# Altium PCB PCB_Aquecedor.PcbDoc
Units mm, origin at the board's own origin, x right, y up, seen from the top; angles counter-clockwise.
Board outline 85.6 x 66.17 mm, 2 copper layers (Top Layer, Bottom Layer); 52 components, 48 nets, 165 pads, 0 vias.
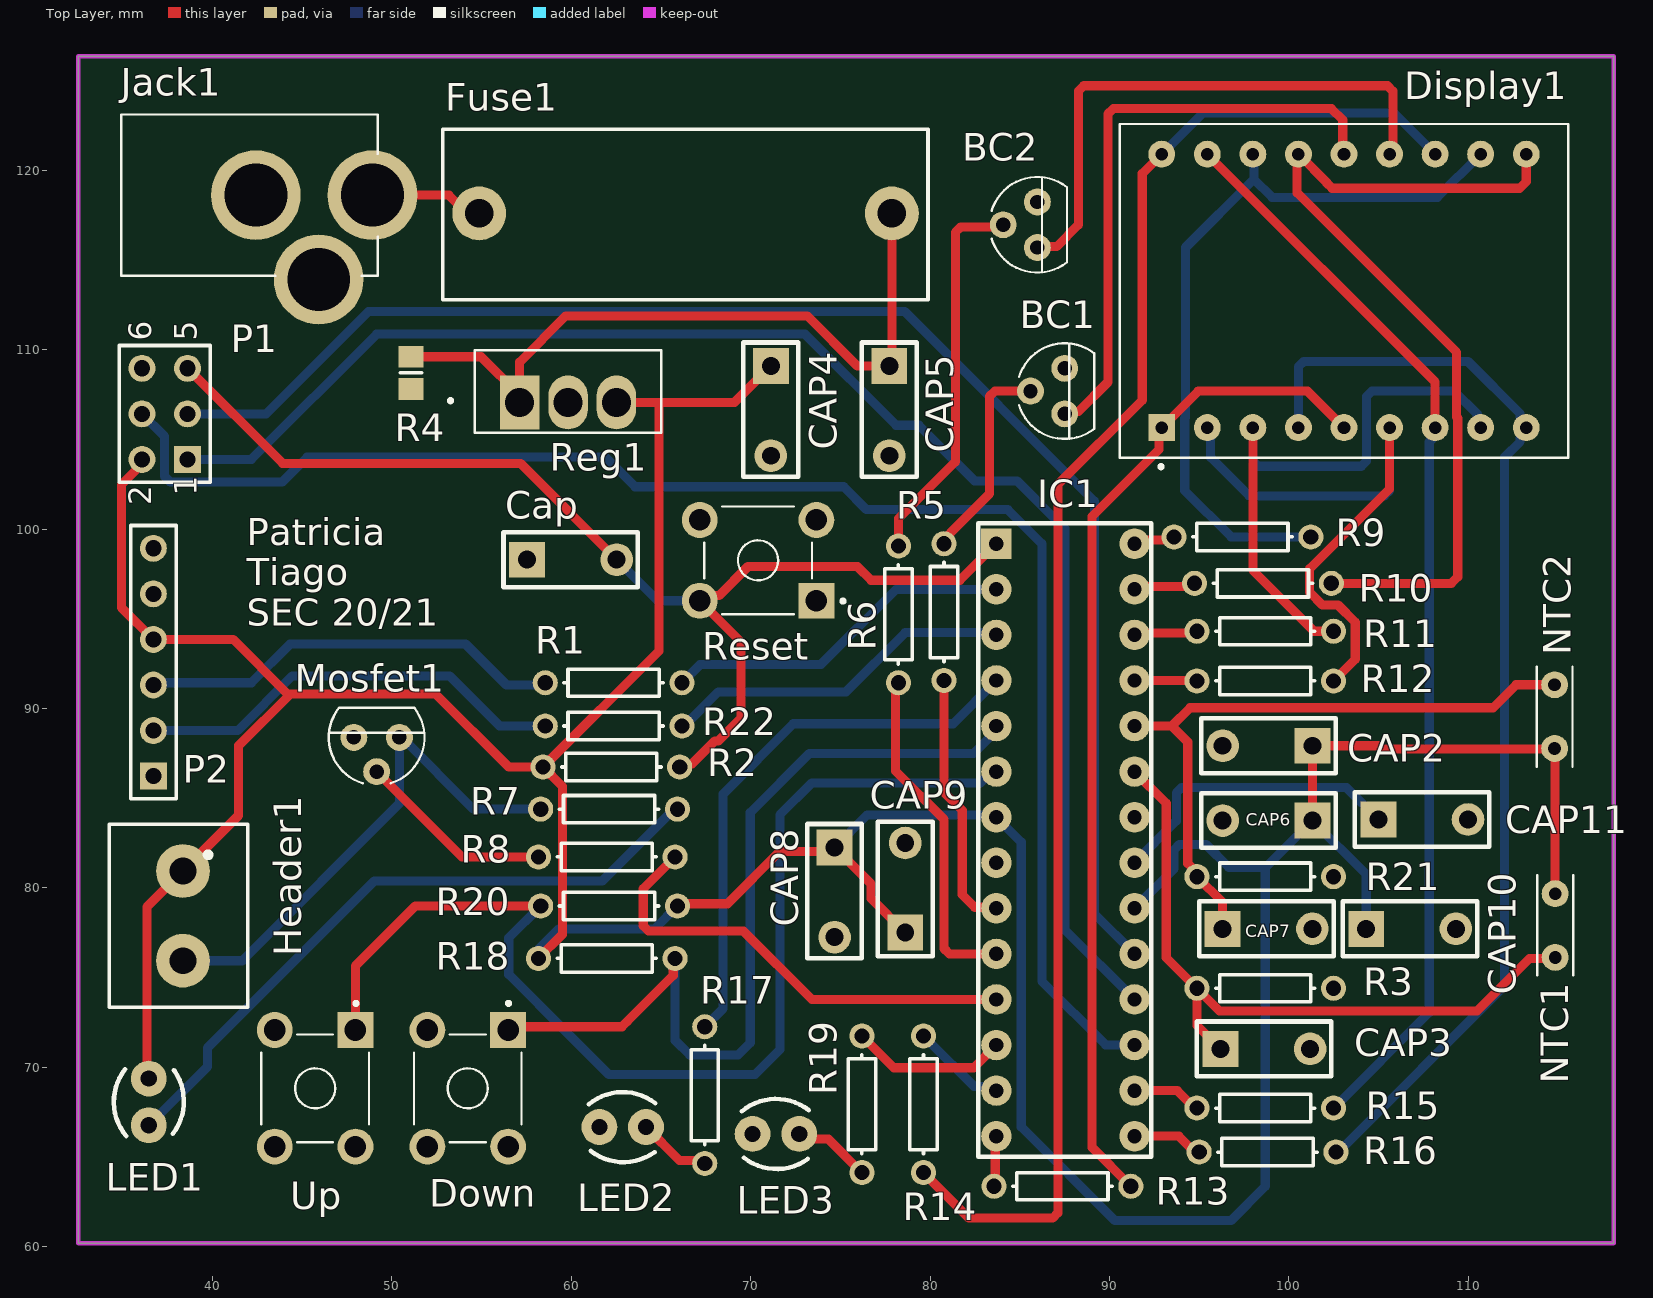
[diagram p0: Top Layer view]
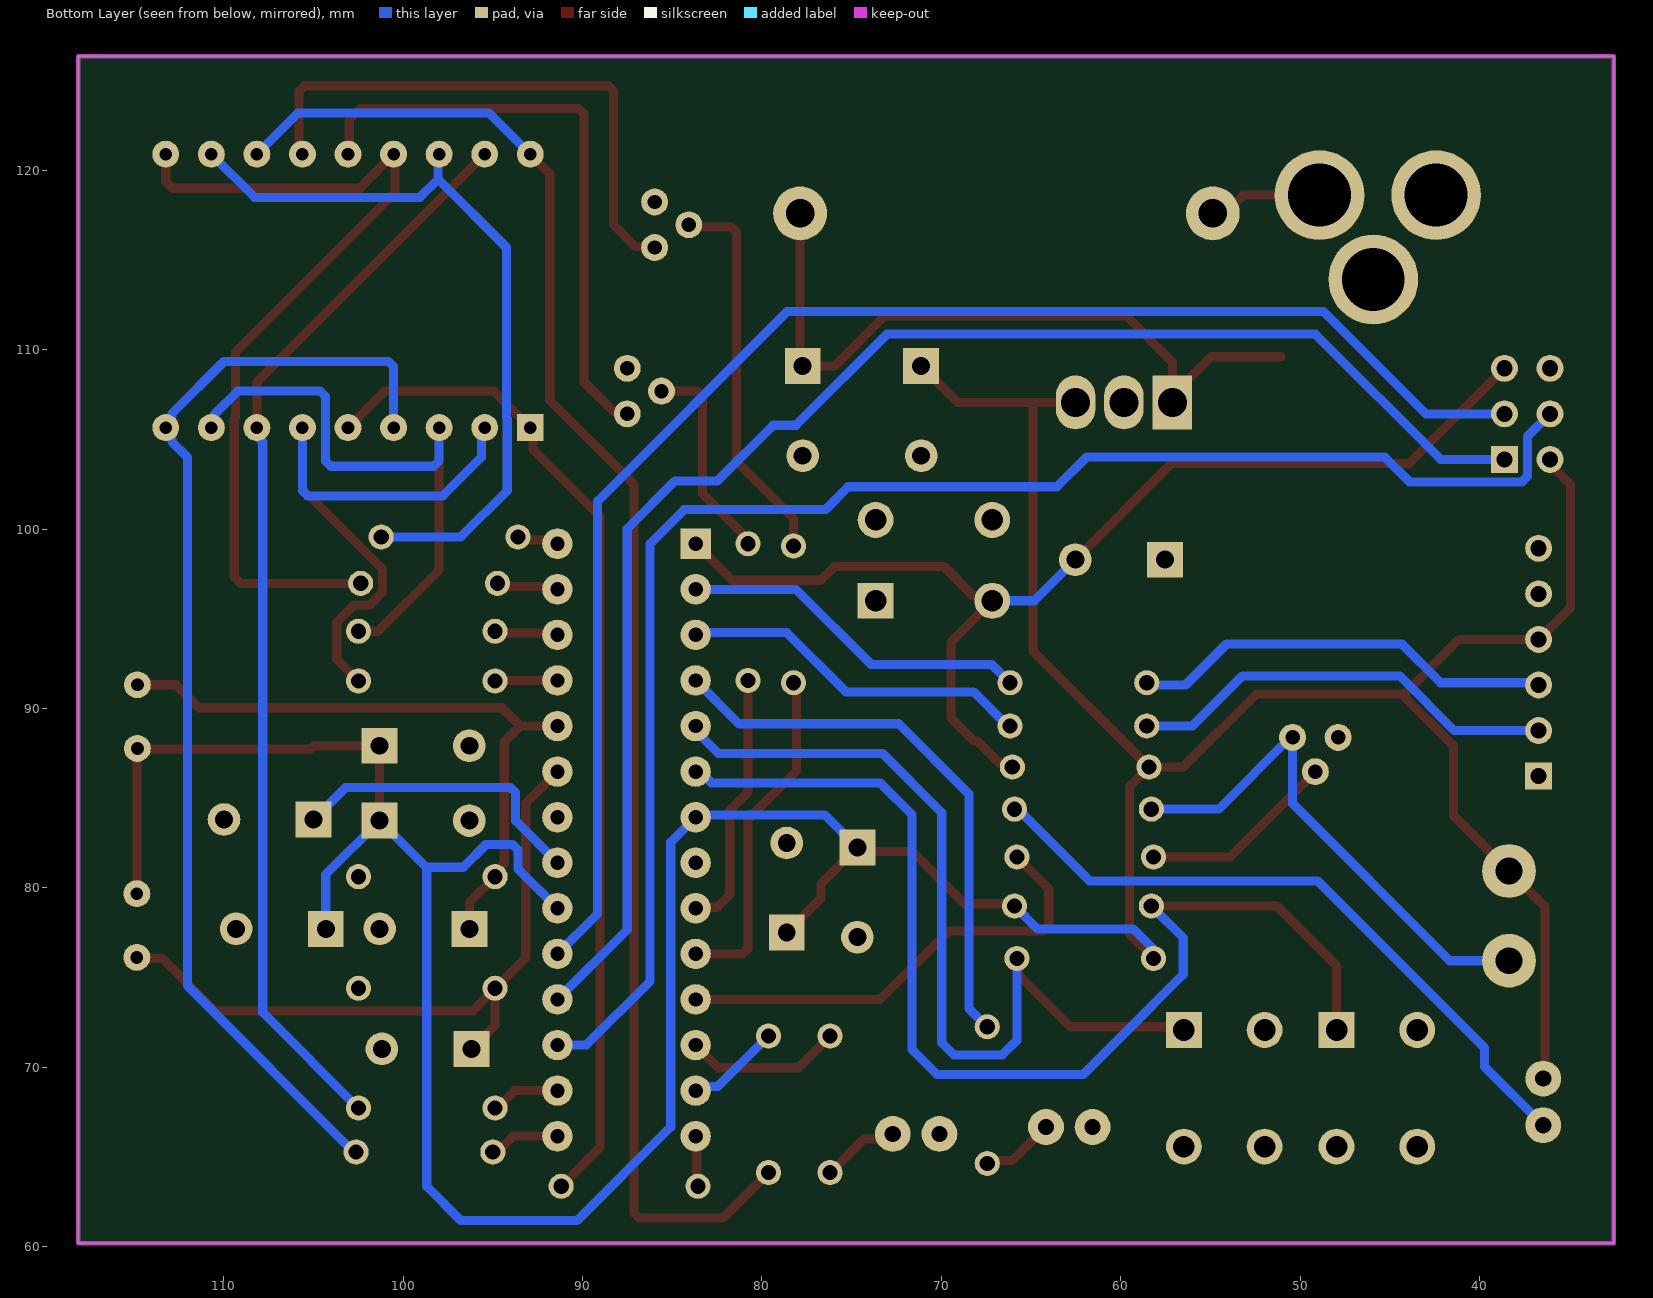
[diagram p1: Bottom Layer view, seen from below]

## Layer stack, top to bottom
Top Solder: solder mask 0.0102, Solder Resist, Dk 3.5
Top Layer: signal copper 0.0356
Dielectric 1: dielectric 0.32, FR-4, Dk 4.8
Bottom Layer: signal copper 0.0356
Bottom Solder: solder mask 0.0102, Solder Resist, Dk 3.5

## Board outline
32.512,60.198 32.512,126.365 118.11,126.365 118.11,60.198

## Design rules (kind name [scope] priority, off if disabled: settings)
Clearance [All] p1: gap=0.254 ignorepadtopadclearanceinfootprint=FALSE except(0: Arc-Hole Track-Hole SMDPad-Hole THPad-Hole Via-Hole Fill-Hole Poly-Hole Region-Hole Text-Hole)
Height [All] p1: minheight=0 maxheight=127 prefheight=12.7
PolygonConnect [All] p1: connectstyle=Relief reliefconductorwidth=0.254 reliefentries=4 polygonreliefangle="90 Angle" airgapwidth=0.254
RoutingVias [All] p1: holewidth=0.711 width=1.27 viastyle="Through Hole" minholewidth=0.711 minwidth=1.27 maxholewidth=0.711 maxwidth=1.27
SolderMaskExpansion [All] p1: expansion=0.102 istentingtop=FALSE
Width [All] p1: maxlimit=1.27 minlimit=0.254 preferedwidth=0.508 minimp=50.000000 maximp=50.000000 favimp=50.000000
29 further rules are at their usual default settings.

## Classes and differential pairs
component class U_Esquematico_MOSFET: Header1 LED1 Mosfet1 R7 R8
component class U_Esquematico_Fonte: CAP4 CAP5 Fuse1 Jack1 R4 Reg1
component class "U_Esquema NTC": CAP2 CAP3 CAP6 CAP7 NTC1 NTC2 R3 R21
component class U_Esquema_Display: BC1 BC2 Display1 R5 R6 R9 R10 R11 R12 R13 R14 R15 R16
component class U_Esquema_ATMEGA328: Cap CAP8 CAP9 CAP10 CAP11 IC1 P1 P2 R1 R2 R22 Reset
component class Esquema_Principal: DOwn LED2 LED3 R17 R18 R19 R20 Up

## Components (designator, comment, footprint, x,y, rotation, side; value= is the part's Value field where it differs from the comment)
BC1 "Transistor BC547" "TRANSISTOR BC547" 87.503,107.696 r90 top
BC2 "Transistor BC547" "TRANSISTOR BC547" 85.979,116.967 r90 top
Cap "100nF" "CAPACITOR ELETRO" 60.031,98.298 r0 top
CAP2 "100nF" "CAPACITOR ELETRO" 98.806,87.926 r180 top
CAP3 "100nF" "CAPACITOR ELETRO" 98.679,71.033 r0 top
CAP4 "10uF" "CAPACITOR ELETRO" 71.12,106.593 r270 top
CAP5 "10uF" "CAPACITOR ELETRO" 77.724,106.593 r270 top
CAP6 "100nF" "CAPACITOR ELETRO" 98.806,83.757 r180 top
CAP7 "100nF" "CAPACITOR ELETRO" 98.806,77.724 r0 top
CAP8 "100nF" "CAPACITOR ELETRO" 74.676,79.756 r270 top
CAP9 "100nF" "CAPACITOR ELETRO" 78.613,80.01 r90 top
CAP10 "100nF" "CAPACITOR ELETRO" 106.807,77.724 r0 top
CAP11 "10nF" "CAPACITOR ELETRO" 107.482,83.82 r0 top
Display1 "Dual 7Segment Display" "DUAL DIGIT DISPLAY" 103.195,113.282 r0 top
Down "Tactil Buttom" "TACTIL BUTTOM" 54.229,68.834 r270 top (schematic designator Buttom2)
Fuse1 "Fuse Holder" "FUSE HOLDER" 66.167,117.602 r0 top
Header1 "Screw Header 2P" "SCREW HEADER 2 POSICOES" 38.354,78.446 r270 top
IC1 "ATmega328" ATMEGA328 83.693,99.187 r90 top
Jack1 "Jack 5mm 12V" "JACK 5MM" 45.918,118.618 r0 top
LED1 "LED" LED_THT 36.449,68.072 r270 top
LED2 "LED" LED_THT 62.865,66.675 r180 top
LED3 "LED" LED_THT 71.404,66.294 r180 top
Mosfet1 "Mosfet BS170" "MOSFET BS170" 49.149,88.392 r180 top
NTC1 "NTC" NTC 114.84,78.431 r270 top
NTC2 "NTC" NTC 114.808,89.027 r90 top
P1 "Header 3X2" HDR2X3 38.608,103.886 r90 top
P2 "Header 6" HDR1X6 36.703,86.233 r90 top
R1 "Res1" AXIAL-0.3 62.357,91.44 r0 top value=1K
R2 "Res1" AXIAL-0.3 62.23,86.741 r0 top value=1K
R3 "Res1" AXIAL-0.3 98.679,74.409 r180 top value=1K
R4 "Res Varistor" 6-0805_N 51.054,108.712 r90 top
R5 "Res1" AXIAL-0.3 80.772,95.377 r90 top value=1K
R6 "Res1" AXIAL-0.3 78.232,95.25 r90 top value=1K
R7 "Res1" AXIAL-0.3 62.103,84.395 r0 top value=1K
R8 "Res1" AXIAL-0.3 61.976,81.732 r180 top value=1K
R9 "Res1" AXIAL-0.3 97.409,99.568 r0 top value=1K
R10 "Res1" AXIAL-0.3 98.552,96.981 r0 top value=1K
R11 "Res1" AXIAL-0.3 98.679,94.31 r0 top value=1K
R12 "Res1" AXIAL-0.3 98.679,91.542 r0 top value=1K
R13 "Res1" AXIAL-0.3 87.376,63.373 r0 top value=1K
R14 "Res1" AXIAL-0.3 79.629,67.945 r270 top value=1K
R15 "Res1" AXIAL-0.3 98.679,67.732 r0 top value=1K
R16 "Res1" AXIAL-0.3 98.806,65.278 r0 top value=1K
R17 "Res1" AXIAL-0.3 67.437,68.453 r90 top value=1K
R18 "Res1" AXIAL-0.3 61.976,76.073 r180 top value=1K
R19 "Res1" AXIAL-0.3 76.2,67.945 r90 top value=1K
R20 "Res1" AXIAL-0.3 62.103,78.994 r180 top value=1K
R21 "Res1" AXIAL-0.3 98.679,80.63 r180 top value=1K
R22 "Res1" AXIAL-0.3 62.357,89.027 r0 top value=1K
Reg1 "Regulador 12-5 7805" "REGULADOR 12-5 7805" 59.817,107.061 r0 top
Reset "Tactil Buttom" "TACTIL BUTTOM" 70.41,98.262 r180 top (schematic designator Buttom1)
Up "Tactil Buttom" "TACTIL BUTTOM" 45.72,68.834 r270 top (schematic designator Buttom3)

## Footprints (in the part's own frame and the unit in brackets; to place one, negate y for a bottom-side part, rotate by r counter-clockwise, add the part's x,y. Pads: shape width x height; smd on the part's side, far side on the other; paste and mask are expansions set on the pad)
6-0805_N [mm] "Chip Resistor, Body 2.0x1.2mm, IPC Medium Density"
  rect 1.2x1.4 smd: 1(-0.9,0) 2(0.9,0)
  silkscreen extent 0,-0.6 0,0.6, body extent -1.07,-0.7 1.07,0.7, height 0.7
ATMEGA328 [mm]
  rect 1.7x1.7 hole 0.8: 1(0,0)
  round 1.7 hole 0.8: 2(-2.54,0) 3(-5.08,0) 4(-7.62,0) 5(-10.16,0) 6(-12.7,0) 7(-15.24,0) 8(-17.78,0) 9(-20.32,0) 10(-22.86,0) 11(-25.4,0) 12(-27.94,0) 13(-30.48,0) 14(-33.02,0) 15(-33.02,-7.7) 16(-30.48,-7.7) 17(-27.94,-7.7) 18(-25.4,-7.7) 19(-22.86,-7.7) 20(-20.32,-7.7) 21(-17.78,-7.7) 22(-15.24,-7.7) 23(-12.7,-7.7) 24(-10.16,-7.7) 25(-7.62,-7.7) 26(-5.08,-7.7) 27(-2.54,-7.7) 28(0,-7.7)
  silkscreen extent -34.16,-8.64 1.14,1.02, body extent -33.91,-7.78 0.74,0.13, height 5.54
AXIAL-0.3 [mm] "Axial Device, Thru-Hole; 2 Leads; 0.3 in Pin Spacing"
  round 1.4 hole 0.85: 1(-3.81,0) 2(3.81,0)
  silkscreen extent -2.77,-0.76 2.77,0.76
"CAPACITOR ELETRO" [mm] "33pF"
  rect 2x2 hole 1: 1(-2.5,0)
  round 1.82 hole 1: 2(2.5,0)
  silkscreen extent -3.81,-1.52 3.68,1.52, body extent -2.75,-1.25 2.75,1.25, height 6.54
"DUAL DIGIT DISPLAY" [mm]
  rect 1.5x1.5 hole 0.7: 1(-10.287,-7.62)
  round 1.5 hole 0.7: 2(-7.747,-7.62) 3(-5.207,-7.62) 4(-2.667,-7.62) 5(-0.127,-7.62) 6(2.413,-7.62) 7(4.953,-7.62) 8(7.493,-7.62) 9(10.033,-7.62) 10(10.033,7.62) 11(7.493,7.62) 12(4.953,7.62) 13(2.413,7.62) 14(-0.127,7.62) 15(-2.667,7.62) 16(-5.207,7.62) 17(-7.747,7.62) 18(-10.287,7.62)
  silkscreen extent -12.63,-9.9 12.37,9.3, body extent -12.63,-9.52 12.37,9.52, height 8
"FUSE HOLDER" [mm]
  round 3 hole 1.6: 1(-11.3,0) 2(11.7,0)
  silkscreen extent -13.33,-4.83 13.72,4.7, body extent -13.12,-4.6 13.48,4.4, height 28.16
HDR1X6 [mm] "Connector; Header; 6 Position"
  rect 1.5x1.5 hole 0.9: 1(0,0)
  round 1.5 hole 0.9: 2(2.54,0) 3(5.08,0) 4(7.62,0) 5(10.16,0) 6(12.7,0)
  silkscreen extent -1.27,-1.27 13.97,1.27
HDR2X3 [mm] "Connector; Header; 3x2 Position"
  rect 1.5x1.5 hole 0.9: 1(0,0)
  round 1.5 hole 0.9: 2(0,2.54) 3(2.54,0) 4(2.54,2.54) 5(5.08,0) 6(5.08,2.54)
  silkscreen extent -1.27,-1.27 6.35,3.81
"JACK 5MM" [mm]
  round 5 hole 3.5: 2(0,-4.7) 3(-3.5,0) 4(3,0)
  silkscreen extent -11,-4.5 3.3,4.5, body extent -10.7,-4.95 3.3,4.45, height 11.5
LED_THT [mm]
  round 2 hole 0.9: A(-1.3,0) K(1.3,0)
  silkscreen extent -1.82,-1.95 1.9,1.96, body extent -1.62,-1.58 1.52,1.52, height 7.48
"MOSFET BS170" [mm]
  round 1.5 hole 0.8: 1(1.27,0) 2(0,1.905) 3(-1.27,0)
  silkscreen extent -2.66,-1.65 2.66,2.55
NTC [mm]
  round 1.5 hole 0.71: 1(-1.25,0) 2(2.3,0)
  silkscreen extent -2.29,-1 3.3,1
"REGULADOR 12-5 7805" [mm]
  rect 2.2x3 hole 1.6: 1(-2.7,0)
  oval 2.2x3 hole 1.6: 2(0,0) 3(2.7,0)
  silkscreen extent -6.65,-1.69 5.2,2.91, body extent -5.08,-1.91 5.08,2.67, height 19.74
"SCREW HEADER 2 POSICOES" [mm]
  round 3 hole 1.5: 1(-2.5,0) 2(2.5,0)
  silkscreen extent -5.1,-4.1 5.1,3.6, body extent -5.08,-4.57 5.58,4.43, height 15.2
"TACTIL BUTTOM" [mm]
  rect 2x2 hole 1.2: 1(-3.25,2.25)
  round 2 hole 1.2: 2(3.25,2.25) 3(-3.25,-2.25) 4(3.25,-2.25)
  silkscreen extent -4.83,-3 3,3, body extent -3.9,-3 3.9,2.99, height 10.5
"TRANSISTOR BC547" [mm]
  round 1.5 hole 0.8: 1(1.27,0) 2(0,1.905) 3(-1.27,0)
  silkscreen extent -2.66,-1.65 2.66,2.55

## Part data
Cap CAP2 CAP3 CAP4 CAP5 CAP6 CAP7 CAP8 CAP9 CAP10 CAP11: library part 33pF, "Condensador"
P1: "Header, 3-Pin, Dual row", LatestRevisionDate=17-Jul-2002, LatestRevisionNote="Re-released for DXP Platform.", Publisher="Altium Limited"
P2: "Header, 6-Pin", LatestRevisionDate=17-Jul-2002, LatestRevisionNote="Re-released for DXP Platform.", Publisher="Altium Limited"
R1 R2 R3 R5 R6 R7 R8 R9 R10 R11 R12 R13 R14 R15 R16 R17 R18 R19 R20 R21 R22: "Resistor", LatestRevisionDate=17-Jul-2002, LatestRevisionNote="Re-released for DXP Platform.", PackageDescription="Axial Device, Thru-Hole; 2 Leads; 0.3 in Pin Spacing", PackageReference=AXIAL-0.3, Published=8-Jun-2000, Publisher="Altium Limited"
R4: "Varistor (Voltage-Sensitive Resistor)", Code_IPC=RESC2012, LatestRevisionDate=29-May-2009, LatestRevisionNote="IPC-7351 Footprint Added.", PackageDescription="Chip Resistor 0805 Case Size", PackageReference=6-0805, PackageVersion=Mar-2003, Published=24-Mar-1999, Publisher="Altium Limited"

## Nets (pads, with @x,y where several pads share a name; then routed paths per layer and width w, separated by ;. In a path a pad name is that pad's centre, name@x,y a point inside that pad or via, vN(x,y) a via of type N, cw(c..) or ccw(c..) an arc to the next point about the centre after c; other vN are vias at no path point)
5V: CAP2.1 CAP4.1 CAP6.1 CAP8.1 CAP9.1 CAP10.1 Header1.1 IC1.7 IC1.20 LED1.A NTC1.1 NTC2.1 P1.2 P2.4 R2.1 R18.2 R20.1 Reg1.3 | length 238.6
  Top Layer w0.508: P1.2 36.068,103.618 34.925,102.475 34.925,95.631 P2.4 41.148,93.853 44.196,90.805 52.451,90.805 56.515,86.741 R2.1 ; LED1.A 36.346,69.475 36.346,78.938 Header1.1 41.45,84.042 41.45,87.932 44.323,90.805 ; R18.2 59.501,77.408 59.501,85.66 R2.1 ; Reg1.3 64.897,107.061 ; R20.1 66.04,79.121 68.707,79.121 71.628,82.042 CAP8.1@74.462,82.042 ; CAP4.1 69.088,107.061 64.897,107.061 ; CAP8.1@74.549,82.129 CAP8.1 76.708,80.224 76.708,79.415 CAP9.1 ; CAP6.1 CAP2.1 104.987,87.926 105.156,87.757 114.788,87.757 NTC2.1 114.824,87.761 114.824,79.697 NTC1.1 ; R2.1 64.897,93.218 64.897,107.061
  Bottom Layer w0.508: R18.2@58.166,76.581 59.309,77.724 64.643,77.724 R20.1 ; CAP8.1 76.494,84.074 83.566,84.074 IC1.7 85.081,82.559 85.081,66.684 90.297,61.468 96.774,61.468 98.679,63.373 98.679,81.153 ; IC1.20 93.599,81.073 93.599,82.125 93.897,82.423 95.377,82.423 96.647,81.153 98.679,81.153 ; CAP10.1 104.307,80.756 CAP6.1 98.702,81.153 98.679,81.153
MISO: IC1.18 P1.1 | length 84.1
  Bottom Layer w0.508: P1.1 42.164,103.886 49.149,110.871 73.025,110.871 78.105,105.791 79.375,105.791 82.483,102.683 84.852,102.683 87.503,100.032 87.503,77.677 IC1.18
MOSI: IC1.17 P1.4 | length 86.6
  Bottom Layer w0.508: P1.4 37.326,105.168 37.326,102.95 37.648,102.628 43.886,102.628 45.271,104.013 61.906,104.013 63.557,102.362 75.184,102.362 76.454,101.092 84.328,101.092 86.233,99.187 86.233,74.803 89.781,71.255 91.385,71.255 IC1.17
NetBC1_1: BC1.1 BC2.1 CAP2.2 CAP3.2 CAP4.2 CAP5.2 CAP6.2 CAP7.2 CAP8.2 CAP9.2 CAP10.2 CAP11.2 Cap.1 Down.4 IC1.8 Jack1.2 Jack1.3 LED2.K LED3.K Mosfet1.1 P1.6 P2.6 R3.1 R4.1 R21.1 Reg1.2 Reset.3 Up.4 | length 2.7
  Top Layer w0.508: Jack1.3@42.418,117.868 Jack1.3 ; Jack1.2@44.441,115.069 45.592,113.918 Jack1.2
NetBC1_2: BC1.2 R5.2 | length 11.7
  Top Layer w0.508: R5.2 80.772,99.428 81.171,99.827 81.171,99.84 83.312,101.981 83.312,107.398 83.61,107.696 BC1.2
NetBC1_3: BC1.3 Display1.14 | length 33.5
  Top Layer w0.508: BC1.3 87.63,106.553 88.265,106.553 89.916,108.204 89.916,123.146 90.214,123.444 102.362,123.444 102.997,122.809 102.997,120.973 Display1.14
NetBC2_2: BC2.2 R6.2 | length 21.6
  Top Layer w0.508: R6.2 78.232,100.584 81.407,103.759 81.407,116.542 81.705,116.84 83.947,116.84 BC2.2
NetBC2_3: BC2.3 Display1.13 | length 31.6
  Top Layer w0.508: BC2.3 86.034,115.752 87.05,115.752 88.265,116.967 88.265,124.416 88.563,124.714 105.493,124.714 105.791,124.416 105.791,121.085 Display1.13
NetButtom2_1: Down.1 IC1.5 R18.1 | length 49.5
  Top Layer w0.508: Down.1 56.658,72.263 62.821,72.263 63.119,72.561 65.683,75.125 65.683,75.97 R18.1
  Bottom Layer w0.508: R18.1 65.786,71.501 66.592,70.695 69.298,70.695 69.977,71.374 69.977,84.201 73.279,87.503 82.423,87.503 83.693,88.773 IC1.5
NetButtom3_1: IC1.6 R20.2 Up.1 | length 64.2
  Top Layer w0.508: Up.1 47.97,75.656 51.308,78.994 R20.2 R20.2@58.42,79.121
  Bottom Layer w0.508: R20.2 56.515,77.216 56.515,75.184 59.817,71.882 62.103,69.596 70.231,69.596 71.628,70.993 71.628,84.074 73.406,85.852 82.799,85.852 83.434,86.487 IC1.6
NetCAP3_1: CAP3.1 IC1.23 NTC1.2 R3.2 | length 39.2
  Top Layer w0.508: IC1.23 93.16,84.72 93.16,76.118 R3.2 ; CAP3.1 94.869,72.343 R3.2 ; NTC1.2 114.782,76.073 113.411,76.073 110.49,73.152 96.126,73.152 R3.2
NetCAP5_1: CAP5.1 Fuse1.2 R4.2 Reg1.1 | length 40.6
  Top Layer w0.508: R4.2 54.966,109.612 Reg1.1@57.117,107.461 ; Reg1.1 Reg1.1@57.117,107.461 ; Fuse1.2 77.867,109.236 CAP5.1 75.946,109.093 73.152,111.887 59.69,111.887 57.117,109.314 Reg1.1@57.117,107.461
NetCAP7_1: CAP7.1 IC1.24 NTC2.2 R21.2 | length 36.8
  Top Layer w0.508: IC1.24 93.472,89.027 ; CAP7.1 96.306,79.193 R21.2 94.869,80.866 94.361,81.374 94.361,88.138 93.472,89.027 ; NTC2.2 112.663,91.327 111.379,90.043 94.488,90.043 93.472,89.027
NetCAP11_1: CAP11.1 IC1.21 | length 17.3
  Top Layer w0.508: IC1.21 91.393,81.327 IC1.21@91.567,81.153
  Bottom Layer w0.508: IC1.21 93.726,83.74 93.726,85.3 94.024,85.598 103.204,85.598 CAP11.1
NetDisplay1_1: Display1.1 Display1.5 R13.2 | length 56.7
  Top Layer w0.508: R13.2 89.027,65.532 89.027,100.711 92.764,104.448 92.764,105.518 Display1.1 92.962,105.662 92.964,105.664 92.964,105.718 94.942,107.696 101.034,107.696 Display1.5
NetDisplay1_2: Display1.2 Display1.6 R12.2 | length 34.3
  Top Layer w0.508: R12.2 103.697,92.75 103.697,94.811 102.734,95.773 101.862,95.773 101.154,96.481 101.154,97.795 105.608,102.249 Display1.6
  Bottom Layer w0.508: Display1.2 95.638,105.472 95.638,104.006 97.79,101.854 105.311,101.854 105.608,102.152 Display1.6
NetDisplay1_3: Display1.3 Display1.8 R11.2 | length 33.8
  Top Layer w0.508: Display1.3 97.988,97.719 101.397,94.31 R11.2 ; Display1.8 110.742,105.662 Display1.8@110.871,105.791
  Bottom Layer w0.508: Display1.3 97.988,103.803 98.286,103.505 104.029,103.505 104.326,103.803 104.326,107.398 104.624,107.696 109.22,107.696 110.498,106.418 110.498,105.852 Display1.8
NetDisplay1_4: Display1.4 Display1.9 R16.2 | length 63
  Top Layer w0.508: Display1.9 113.228,105.735 Display1.9@113.284,105.791
  Bottom Layer w0.508: Display1.4 100.528,109.049 100.826,109.347 109.982,109.347 112.886,106.443 112.886,106.272 113.228,105.931 113.228,105.394 112.884,105.05 112.884,104.883 112.014,104.013 112.014,74.549 102.743,65.278 R16.2
NetDisplay1_7: Display1.7 Display1.17 R15.2 | length 60.8
  Top Layer w0.508: Display1.17 108.148,108.202 Display1.7
  Bottom Layer w0.508: R15.2 107.823,73.066 107.823,104.869 107.958,105.004 107.958,105.472 Display1.7
NetDisplay1_10: Display1.10 Display1.15 R10.2 | length 49.6
  Top Layer w0.508: Display1.15 100.457,120.831 100.457,118.745 109.347,109.855 109.347,106.242 109.406,106.183 109.406,97.338 109.049,96.981 R10.2 ; Display1.15@100.564,120.867 102.108,119.322 102.108,119.297 102.406,118.999 112.859,118.999 113.228,119.368 Display1.10
NetDisplay1_11: Display1.11 Display1.16 R9.2 | length 42.7
  Bottom Layer w0.508: Display1.16@98.09,121.004 Display1.16 98.044,120.846 98.044,119.507 ; R9.2 96.774,99.568 94.19,102.152 94.19,106.183 94.234,106.227 94.234,115.697 98.044,119.507 ; Display1.11 108.277,118.491 99.06,118.491 98.044,119.507
NetDisplay1_12: Display1.12 Display1.18 R14.2 | length 87.3
  Top Layer w0.508: R14.2 82.169,61.595 86.824,61.595 87.122,61.893 87.122,102.489 91.821,107.188 91.821,119.815 Display1.18 ; Display1.12 108.202,120.902 Display1.12@108.204,120.904
  Bottom Layer w0.508: Display1.18 95.196,123.19 105.86,123.19 Display1.12
NetFuse1_1: Fuse1.1 Jack1.4 | length 7.3
  Top Layer w0.508: Jack1.4@48.418,118.618 53.177,118.618 54.193,117.602 Fuse1.1 ; Jack1.4@48.991,117.291 Jack1.4@49.146,117.447 ; Fuse1.1@54.853,117.447 Fuse1.1@55.02,117.614
NetHeader1_2: Header1.2 Mosfet1.3 R7.1 | length 28.9
  Bottom Layer w0.508: Header1.2 41.656,75.946 50.419,84.709 Mosfet1.3 50.546,88.392 54.543,84.395 R7.1
NetIC1_2: IC1.2 R1.2 | length 19.7
  Bottom Layer w0.508: R1.2 67.183,92.456 73.914,92.456 78.105,96.647 IC1.2
NetIC1_3: IC1.3 R22.2 | length 19.7
  Bottom Layer w0.508: R22.2 66.294,89.027 68.199,90.932 75.311,90.932 78.613,94.234 83.566,94.234 IC1.3
NetIC1_4: IC1.4 R17.2 | length 31.3
  Bottom Layer w0.508: R17.2 68.453,73.279 68.453,85.235 72.372,89.154 81.28,89.154 IC1.4
NetIC1_9: IC1.9 R5.1 | length 14.6
  Top Layer w0.508: R5.1 80.772,85.344 81.788,84.328 81.788,79.629 82.49,78.927 83.633,78.927 IC1.9
NetIC1_10: IC1.10 R6.1 | length 19.1
  Top Layer w0.508: R6.1 78.062,91.27 78.062,86.53 80.772,83.82 80.772,76.625 81.07,76.327 IC1.10
NetIC1_11: IC1.11 R8.1 | length 26
  Top Layer w0.508: R8.1 64.008,79.954 64.008,77.895 64.306,77.597 69.596,77.597 73.406,73.787 IC1.11
NetIC1_12: IC1.12 R19.2 | length 8.8
  Top Layer w0.508: R19.2 77.978,69.977 82.423,69.977 IC1.12
NetIC1_13: IC1.13 R14.1 | length 5.7
  Top Layer w0.508: IC1.13@83.502,68.707 IC1.13
  Bottom Layer w0.508: R14.1 79.883,71.755 80.01,71.628 79.92,71.538 79.92,71.464 82.449,68.935 83.465,68.935 IC1.13
NetIC1_14: IC1.14 R13.1 | length 2.8
  Top Layer w0.508: R13.1 83.629,63.436 83.629,66.103 IC1.14
NetIC1_15: IC1.15 R16.1 | length 4
  Top Layer w0.508: IC1.15 93.866,66.167 94.755,65.278 R16.1
NetIC1_16: IC1.16 R15.1 | length 3.9
  Top Layer w0.508: IC1.16 93.776,68.707 94.751,67.732 R15.1
NetIC1_22: IC1.22
NetIC1_25: IC1.25 R12.1 | length 3.5
  Top Layer w0.508: IC1.25 91.406,91.554 94.856,91.554 R12.1
NetIC1_26: IC1.26 R11.1 | length 3.6
  Top Layer w0.508: IC1.26 91.495,94.209 94.767,94.209 R11.1
NetIC1_27: IC1.27 R10.1 | length 3.5
  Top Layer w0.508: IC1.27 91.56,96.814 94.575,96.814 R10.1
NetIC1_28: IC1.28 R9.1 | length 2.4
  Top Layer w0.508: IC1.28 91.603,99.397 93.428,99.397 R9.1
NetLED1_K: LED1.K R7.2 | length 37.4
  Top Layer w0.508: LED1.K LED1.K@36.479,66.802
  Bottom Layer w0.508: LED1.K 39.721,70.044 39.721,71.09 49.022,80.391 61.722,80.391 65.726,84.395 R7.2
NetLED2_A: LED2.A R17.1 | length 4.3
  Top Layer w0.508: LED2.A 66.026,64.814 67.266,64.814 R17.1 R17.1@67.437,64.785
NetLED3_A: LED3.A R19.1 | length 4.5
  Top Layer w0.508: LED3.A 72.989,66.009 74.326,66.009 R19.1 R19.1@76.2,64.262
NetMosfet1_2: Mosfet1.2 R8.2 | length 11
  Top Layer w0.508: Mosfet1.2 53.904,81.732 R8.2
RST: Cap.2 IC1.1 P1.5 R2.2 Reset.2 | length 64.5
  Top Layer w0.508: P1.5 43.911,103.663 57.166,103.663 Cap.2 ; R2.2 66.211,86.912 66.719,86.912 68,88.193 68.188,88.193 69.469,89.473 69.469,93.703 Reset.2 67.445,96.297 68.23,96.297 69.85,97.917 75.946,97.917 76.708,97.155 81.661,97.155 IC1.1
  Bottom Layer w0.508: Cap.2 64.817,96.012 Reset.2
RX: P2.2 R22.1 | length 24.3
  Bottom Layer w0.508: P2.2 41.402,88.773 44.45,91.821 53.213,91.821 56.007,89.027 R22.1
SCK: IC1.19 P1.3 | length 83.5
  Bottom Layer w0.508: P1.3 42.989,106.426 48.704,112.141 50.292,112.141 78.569,112.141 89.154,101.556 89.154,78.566 IC1.19
TX: P2.3 R1.1 | length 23.8
  Bottom Layer w0.508: P2.3 36.83,91.44 42.164,91.44 44.323,93.599 54.102,93.599 56.388,91.313 58.42,91.313 R1.1
pads on no net: Down.2 Down.3 P2.1 P2.5 Reset.1 Reset.4 Up.2 Up.3

## Polygon pours and split planes (outlines as drawn)
NetBC1_1 on Top Layer "Top Layer-No Net" (solid, shelved, pour order 2): 32.512,60.198 32.512,126.365 118.11,126.365 118.11,60.198
NetBC1_1 on Bottom Layer "Top Layer-No Net1" (solid, shelved, pour order 4): 32.512,60.198 32.512,126.365 118.11,126.365 118.11,60.198

## Keep-outs
Keep-Out Layer:
  lines w0.254: 32.512,60.198 32.512,126.365 118.11,126.365 118.11,64.008 118.11,60.198 96.52,60.198 53.848,60.198 32.639,60.198 32.512,60.198

## Silkscreen, mask and mechanical layers (free items; w line width, h text height)
Top Overlay:
  text "Patricia  / Tiago / SEC 20/21" at 41.91,94.615 h1.5

## Text inside footprints (layer, text, board x,y; h text height)
P1: Top Overlay "1" at 39.116,101.854 h1.27 r90; Top Overlay "2" at 36.576,101.346 h1.27 r90; Top Overlay "5" at 39.116,110.49 h1.27 r90; Top Overlay "6" at 36.576,110.49 h1.27 r90